# EAGLE board Tugas Akhir1 (EAGLE 7.5.0)
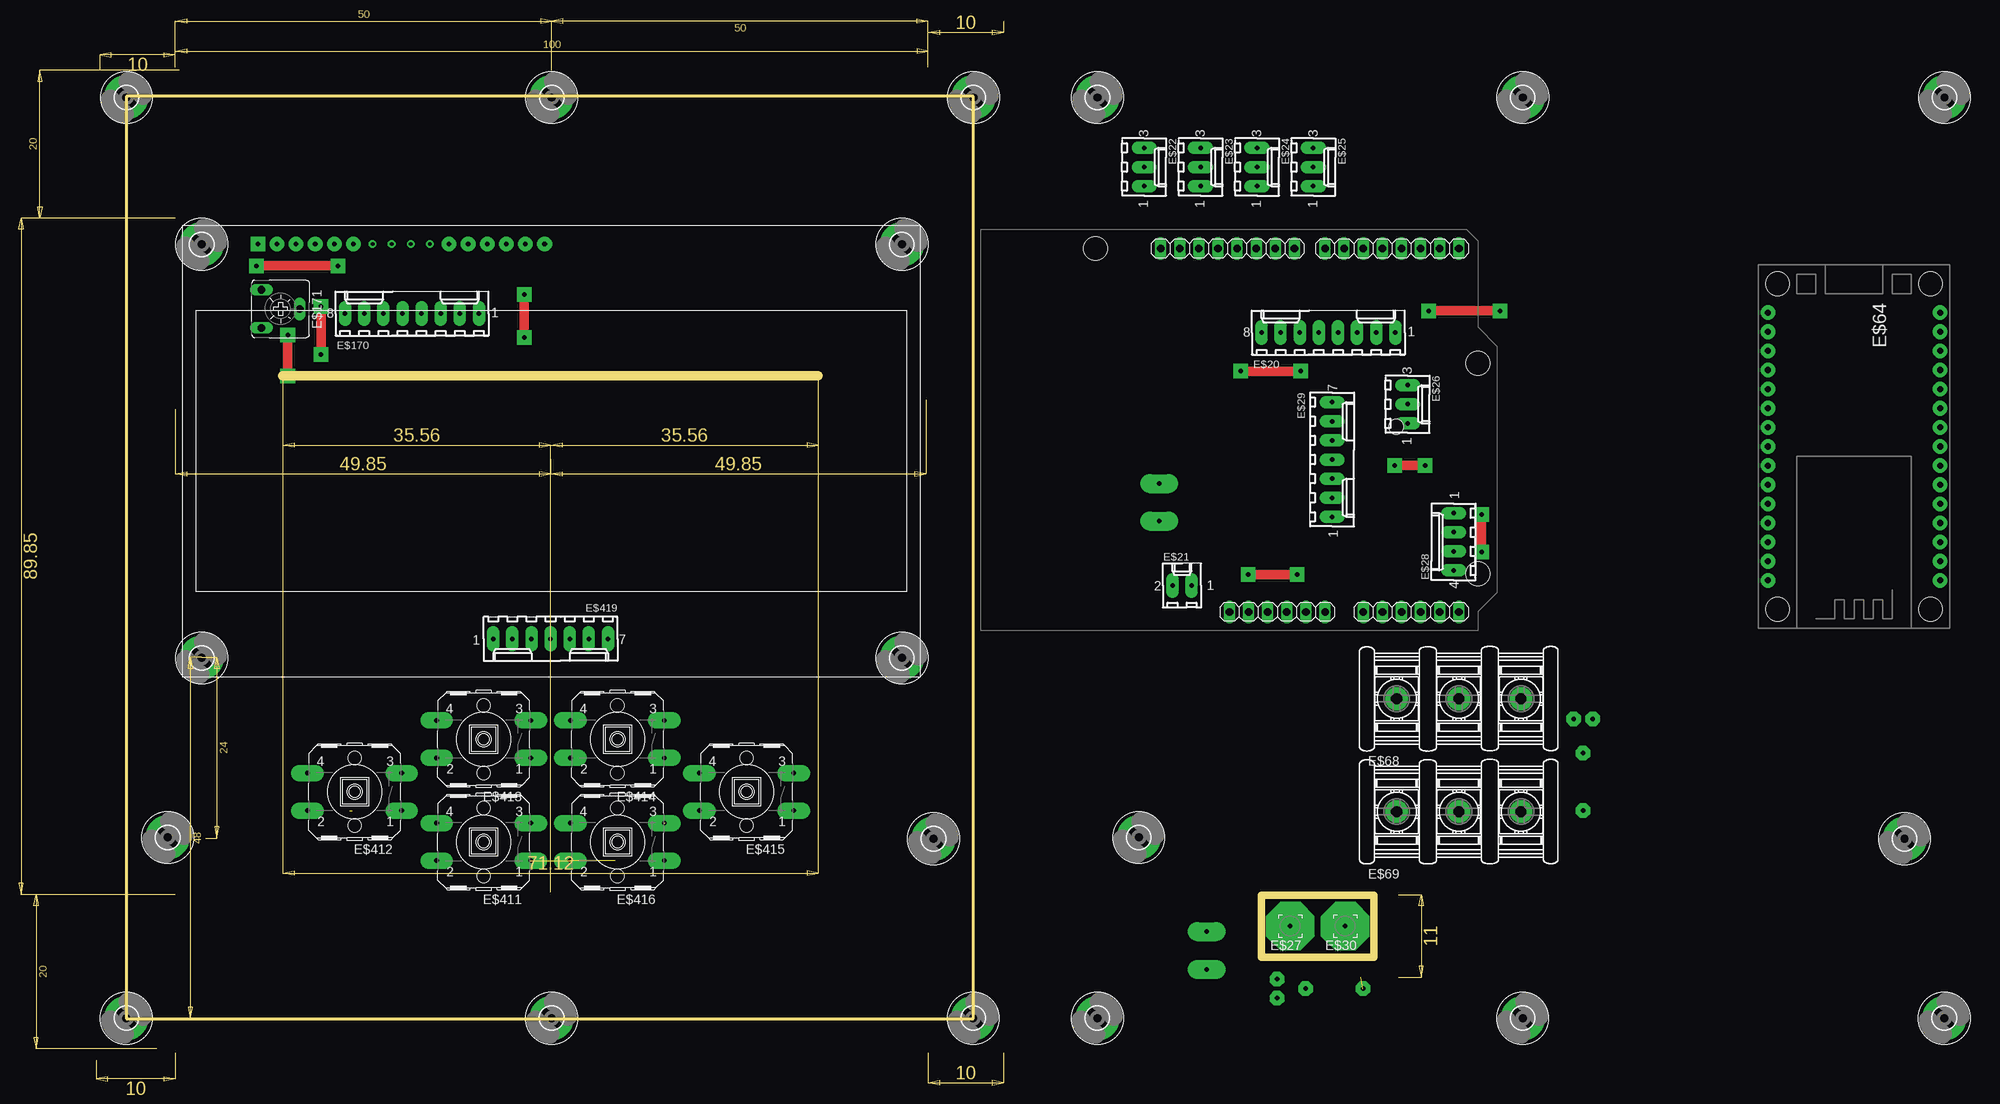
[diagram p0: board, top side]
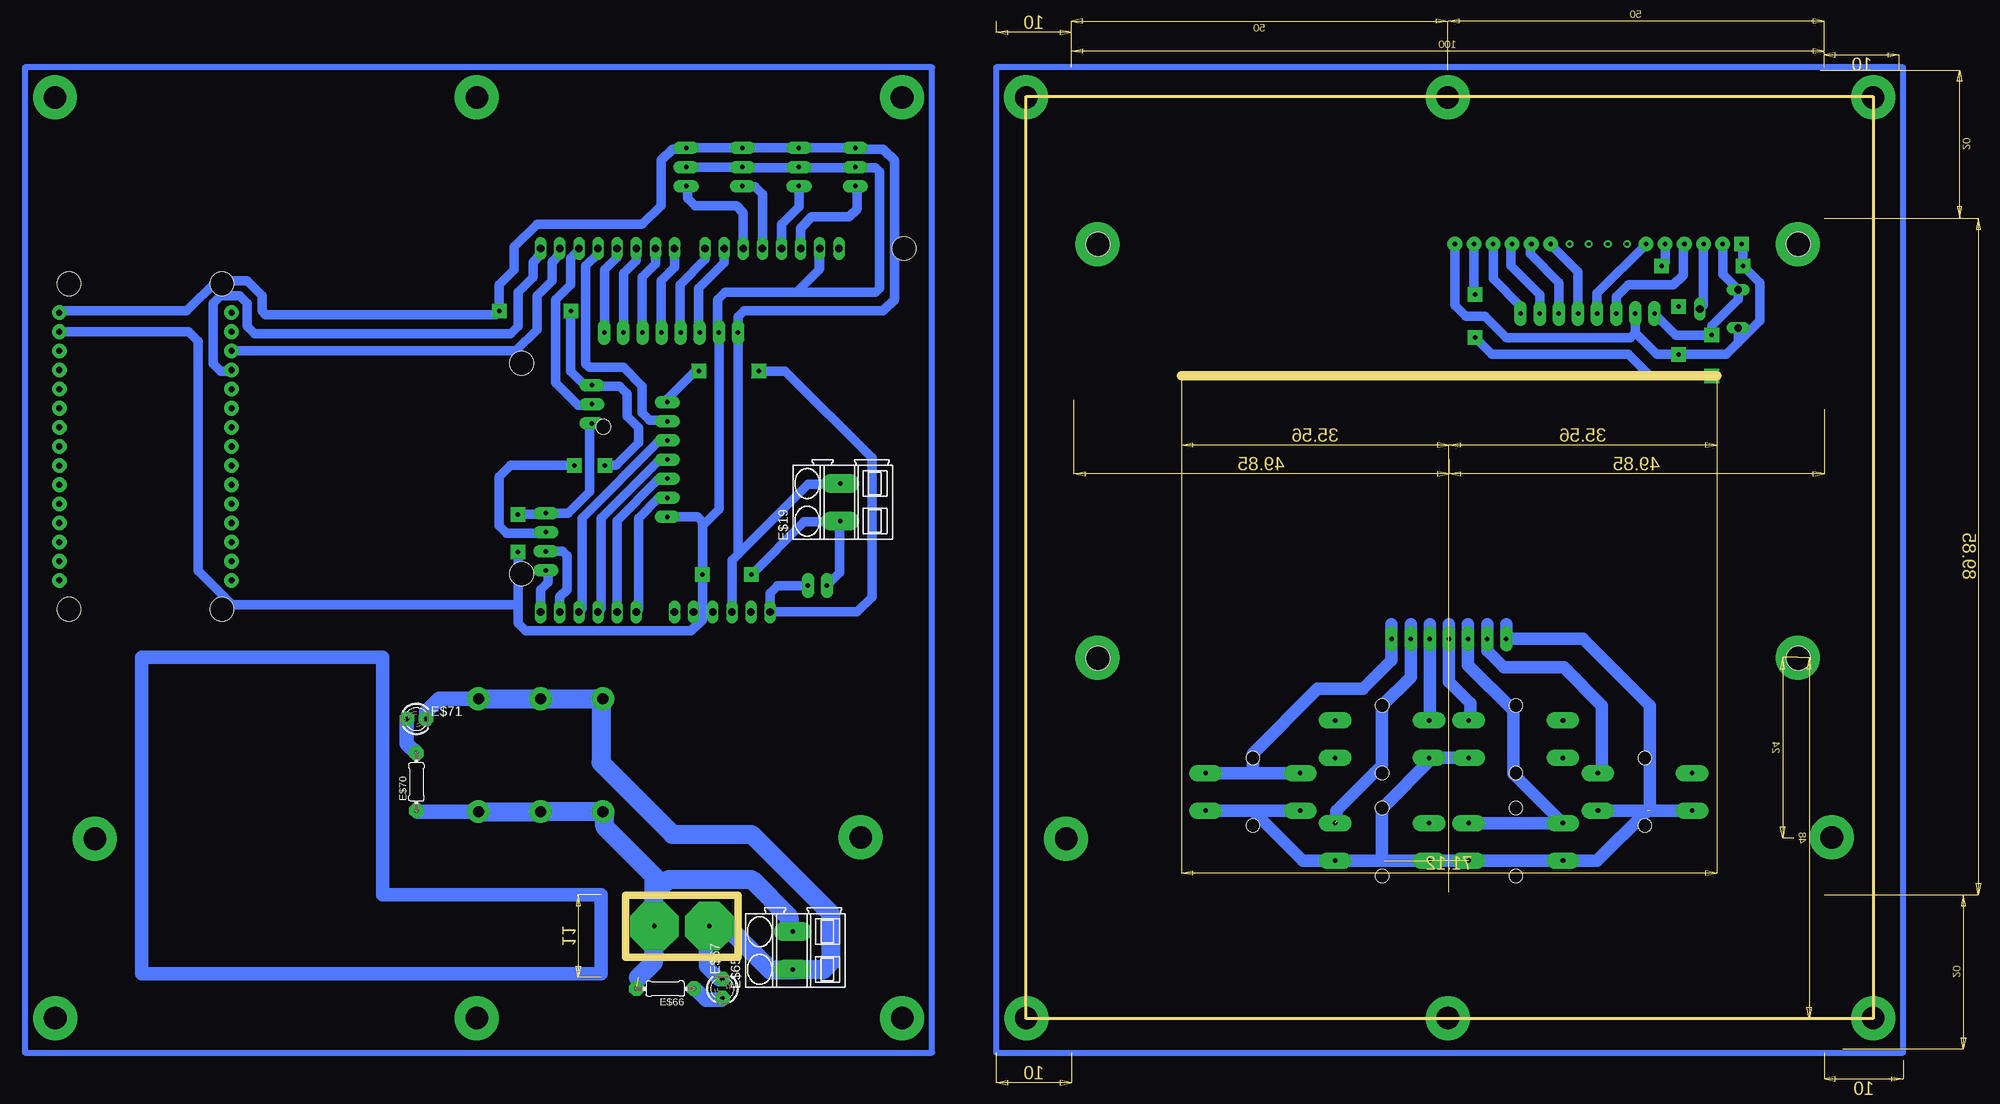
[diagram p1: board, bottom side, seen from below]

Size 186.6 x 141.6 mm. Coordinates in mm from the lower left corner, seen from the top.
Outline: 35.08,94.19 106.2,94.19
Outline: 126.8,131.3 14.3,131.3 14.3,8.8 126.8,8.8 126.8,131.3
Outline: 180.02,25.23 180.02,16.97 165.09,16.97 165.09,25.23 180.02,25.23
Copper layers (1*16): Top 0.035mm / dielectric 1.5mm / Bottom 0.035mm
Design rules "default": minimum track width 10mil, minimum drill 24mil, track to track 8mil, track to pad 8mil, pad to pad 8mil, via to via 8mil, smd to smd 8mil, copper to edge 40mil, drill to drill 8mil, minimum pad ring 10mil, minimum via ring 8mil, stop-mask expansion 4mil, vias tented up to drill 0mil, thermal gap 10mil

## Footprints (pad centres in the part's own frame; a part is rotated, then mirrored left to right if it is on the bottom)
3,0-PAD = drill 3 pad 5.842: B3,0 0,0
ARDUINO2009 = drill 1.016 long: 1 33.02,2.54; 2 35.56,2.54; 3 38.1,2.54; 4 40.64,2.54; 5 43.18,2.54; 6 45.72,2.54; 7 50.8,2.54; 8 53.34,2.54; 9 55.88,2.54; 10 58.42,2.54; 11 60.96,2.54; 12 63.5,2.54; 13 63.5,50.8; 14 60.96,50.8; 15 58.42,50.8; 16 55.88,50.8; 17 53.34,50.8; 18 50.8,50.8; 19 48.26,50.8; 20 45.72,50.8; 21 41.656,50.8; 22 39.116,50.8; 23 36.576,50.8; 24 34.036,50.8; 25 31.496,50.8; 26 28.956,50.8; 27 26.416,50.8; 28 23.876,50.8 | hole 3.2: 15.24,50.8; 66.04,35.56; 66.04,7.62 | hole 2: 55.17,27.114
SMKDSP_1,5/2 = drill 0.6 pad 2.54 long: 1 -2.5,0; 2 2.5,0
6410-08 = drill 0.6 pad 1.676 long: 1 8.89,0; 2 6.35,0; 3 3.81,0; 4 1.27,0; 5 -1.27,0; 6 -3.81,0; 7 -6.35,0; 8 -8.89,0
6410-02 = drill 0.6 pad 1.676 long: 1 1.27,0; 2 -1.27,0
6410-03 = drill 0.6 pad 1.676 long: 1 2.54,0; 2 0,0; 3 -2.54,0
3,17/1,3 = drill 0.6 pad 6.452 octagon: 1 0,0
6410-04 = drill 0.6 pad 1.676 long: 1 3.81,0; 2 1.27,0; 3 -1.27,0; 4 -3.81,0
6410-07 = drill 0.6 pad 1.676 long: 1 7.62,0; 2 5.08,0; 3 2.54,0; 4 0,0; 5 -2.54,0; 6 -5.08,0; 7 -7.62,0
ESP12E_DEVKIT = drill 0.8 pad 1.93: 3V3@0 -11.43,-7.62; 3V3@1 11.43,5.08; 3V3@2 11.43,-17.78; AD0 -11.43,17.78; CLK -11.43,-2.54; CMD -11.43,2.54; D0 11.43,17.78; D1 11.43,15.24; D2 11.43,12.7; D3 11.43,10.16; D4 11.43,7.62; D5 11.43,0; D6 11.43,-2.54; D7 11.43,-5.08; D8 11.43,-7.62; EN -11.43,-10.16; GND@0 -11.43,-5.08; GND@1 -11.43,-15.24; GND@2 11.43,2.54; GND@3 11.43,-15.24; RST -11.43,-12.7; RSV@0 -11.43,15.24; RSV@1 -11.43,12.7; RX 11.43,-10.16; SD0 -11.43,0; SD1 -11.43,5.08; SD2 -11.43,7.62; SD3 -11.43,10.16; TX 11.43,-12.7; VIN -11.43,-17.78 | hole 3.2: -10.16,21.59; 10.16,21.59; 10.16,-21.59; -10.16,-21.59
0204/7 = drill 0.6 pad 1.93 octagon: 1 -3.81,0; 2 3.81,0
LED3MM = drill 0.6 pad 1.93 octagon: A -1.27,0; K 1.27,0
5202-03-N-02 = drill 1.5 pad 3: 1 -8.25,0; 2 0,0; 3 8.25,0
LCD-20X4-4HOLES = drill 0.6 pad 1.93 square: P$1 10,57.5 | drill 0.6 pad 1.93: P$2 12.54,57.5; P$3 15.08,57.5; P$4 17.62,57.5; P$5 20.16,57.5; P$6 22.7,57.5; P$11 35.4,57.5; P$12 37.94,57.5; P$13 40.48,57.5; P$14 43.02,57.5; P$15 45.56,57.5; P$16 48.1,57.5 | drill 0.5 pad 0.254: P$7 25.24,57.5; P$8 27.78,57.5; P$9 30.32,57.5; P$10 32.86,57.5 | hole 3.2: 2.5,2.5; 2.5,57.5; 95.5,57.5; 95.5,2.5
CA6V = drill 1.016 long: A -2.54,-2.54; E 2.54,-2.54; S 0,2.54
B3F-40XX = drill 0.6 pad 2.184 long: 1 -6.248,2.489; 2 6.248,2.489; 3 -6.248,-2.489; 4 6.248,-2.489 | hole 1.803: 0,-4.496; 0,4.496

## Placement (x,y rotation side)
E$1  [3,0-PAD]  14.28,8.88 0 top
E$2  [3,0-PAD]  126.78,8.88 0 top
E$3  [3,0-PAD]  14.29,131.15 0 top
E$4  [3,0-PAD]  126.81,131.15 0 top
E$5  [3,0-PAD]  70.79,131.15 0 top
E$6  [3,0-PAD]  70.78,8.88 0 top
E$7  [3,0-PAD]  148.78,32.88 0 top
E$8  [3,0-PAD]  250.5,32.7 0 top  (outside the outline)
E$9  [ARDUINO2009]  127.8,60.3 0 top
E$13  [3,0-PAD]  143.28,8.88 0 top
E$14  [3,0-PAD]  255.78,8.88 0 top  (outside the outline)
E$15  [3,0-PAD]  143.29,131.15 0 top
E$16  [3,0-PAD]  255.81,131.15 0 top  (outside the outline)
E$17  [3,0-PAD]  199.79,131.15 0 top  (outside the outline)
E$18  [3,0-PAD]  199.78,8.88 0 top  (outside the outline)
E$19  [SMKDSP_1,5/2]  151.48,77.38 90 bottom
E$20  [6410-08]  173.97,99.92 0 top
E$21  [6410-02]  154.52,66.36 0 top
E$22  [6410-03]  149.48,121.91 270 top
E$23  [6410-03]  156.98,121.91 270 top
E$24  [6410-03]  164.48,121.91 270 top
E$25  [6410-03]  171.98,121.91 270 top
E$26  [6410-03]  184.48,90.41 270 top
E$27  [3,17/1,3]  168.91,21.1 180 top
E$28  [6410-04]  190.6,72.14 90 top  (outside the outline)
E$29  [6410-07]  174.45,83.07 270 top
E$30  [3,17/1,3]  176.21,21.1 180 top
E$64  [ESP12E_DEVKIT]  243.8,84.8 180 top  (outside the outline)
E$65  [SMKDSP_1,5/2]  157.79,17.86 90 bottom
E$66  [0204/7]  174.75,12.8 180 bottom
E$67  [LED3MM]  167.13,12.8 90 bottom
E$68  [5202-03-N-02]  191.3,51.3 0 top
E$69  [5202-03-N-02]  191.3,36.3 0 top
E$70  [0204/7]  207.8,40.25 90 bottom  (outside the outline)
E$71  [LED3MM]  207.8,48.63 0 bottom  (outside the outline)
E$169  [LCD-20X4-4HOLES]  21.75,54.18 0 top
E$170  [6410-08]  52.23,102.44 0 top
E$171  [CA6V]  34.77,103.08 270 top
E$411  [B3F-40XX]  61.75,32.28 180 top
E$412  [B3F-40XX]  44.61,38.95 180 top
E$413  [B3F-40XX]  61.75,45.93 180 top
E$414  [B3F-40XX]  79.53,45.93 180 top
E$415  [B3F-40XX]  96.68,38.95 180 top
E$416  [B3F-40XX]  79.53,32.28 180 top
E$417  [3,0-PAD]  19.78,32.88 0 top
E$418  [3,0-PAD]  121.5,32.7 0 top
E$419  [6410-07]  70.64,59.27 180 top
E$420  [3,0-PAD]  24.29,56.72 0 top
E$421  [3,0-PAD]  117.31,56.72 0 top
E$422  [3,0-PAD]  24.29,111.65 0 top
E$423  [3,0-PAD]  117.31,111.65 0 top

## Library data of the parts
E$1-E$8 E$13-E$18 E$417 E$418 E$420-E$423 = holes
E$9 = arduino
E$19 E$65 = con-phoenix-smkdsp
E$20-E$26 E$28 E$29 E$170 E$419 = con-molex
E$27 E$30 = wirepad
E$64 = ESP12E_DEVKIT
E$66 E$70 = resistor
E$67 E$71 = led
E$68 E$69 = con-ebyelectro
E$169 = HD44780LCD
E$171 = pot
E$411-E$416 = switch-omron

## Nets
S$75: E$9.16 E$29.6
S$76: E$9.4 E$9.5 E$9.27 E$19.1 E$20.7 E$21.2 E$22.2 E$23.2 E$24.2 E$25.2 E$26.1 E$28.1 E$29.1 E$64.GND@1
S$77: E$9.1 E$21.1 E$29.7
S$79: E$9.13 E$64.RX
S$80: E$9.26 E$22.1
S$81: E$9.25 E$23.1
S$82: E$9.24 E$24.1
S$83: E$9.23 E$25.1
S$90: E$9.14 E$64.TX
S$95: E$9.17 E$20.1
S$96: E$9.18 E$20.2
S$97: E$9.19 E$20.3
S$98: E$9.20 E$20.4
S$99: E$9.12 E$28.4
S$100: E$9.11 E$28.3
S$101: E$9.7 E$29.2
S$102: E$9.8 E$29.3
S$103: E$9.9 E$29.4
S$104: E$9.10 E$29.5
S$105: E$9.21 E$20.5
S$106: E$9.22 E$20.6
S$107: E$9.15 E$26.2
S$110: E$9.3 E$19.2 E$20.8 E$22.3 E$23.3 E$24.3 E$25.3 E$26.3 E$28.2 E$64.VIN
S$119: E$27.1 E$65.1 E$67.K E$68.1 E$68.2 E$68.3 E$71.K
S$120: E$30.1 E$65.2 E$66.2 E$69.1 E$69.2 E$69.3 E$70.1
S$121: E$70.2 E$71.A
S$122: E$66.1 E$67.A
S$213: E$169.P$2 E$169.P$15 E$170.8 E$171.A
S$214: E$169.P$1 E$169.P$5 E$169.P$16 E$170.7 E$171.E
S$215: E$169.P$4 E$170.6
S$216: E$169.P$6 E$170.5
S$217: E$169.P$14 E$170.1
S$218: E$169.P$13 E$170.2
S$219: E$169.P$12 E$170.3
S$220: E$169.P$11 E$170.4
S$221: E$169.P$3 E$171.S
S$401: E$411.3 E$411.4 E$419.3
S$402: E$411.1 E$411.2 E$412.1 E$412.2 E$413.1 E$414.2 E$415.1 E$415.2 E$416.1 E$416.2 E$419.1
S$403: E$412.3 E$419.2
S$404: E$413.3 E$419.4
S$405: E$414.4 E$419.5
S$406: E$416.3 E$419.6
S$407: E$415.3 E$415.4 E$419.7

## Tracks (layer width: path | path; a pad name or v marks a point on that pad's centre or on a via)
S$1
  Bottom 0.813: 139.3,135.15 259.81,135.15 259.81,4.29 139.3,4.29 139.3,135.15
S$2  (via drill 0.6 pad 1.93)
  other vias: 163.3,67.8
S$56  (via drill 0.6 pad 1.93)
  other vias: 169.8,67.8
S$75
  Bottom 1.27: E$9.16 183.68,110.42 185.3,108.8 185.3,95.8 184.8,95.3 180.3,95.3 177.8,92.8 177.8,89.3 176.8,88.3 174.6,88.3 E$29.6
S$76  (via drill 0.6 pad 1.93)
  Top 1.27: v169.8,67.8 v163.3,67.8 | v194.3,75.8 v194.3,70.8
  Bottom 0.406: 184.8,85.7 184.8,85.8
  Bottom 1.27: E$9.5 E$9.4 169.76,62.84 169.8,62.8 | 169.8,62.8 v169.8,67.8 169.8,74.3 | v163.3,67.8 156.3,74.8 151.56,74.8 | 151.56,74.8 E$19.1 | E$29.1 170.45,75.45 169.8,74.8 169.8,74.3 | 154.3,108.3 154.22,108.38 E$9.27 154.22,110.88 154.3,110.8 154.3,108.3 | 157.3,105.3 166.8,105.3 167.8,104.3 167.8,100.11 E$20.7 167.62,76.48 169.8,74.3 | 154.3,108.3 157.3,105.3 | 157.3,105.3 146.8,105.3 146.3,105.8 146.3,121.3 146.8,121.8 149.3,121.8 | 149.3,121.8 149.36,121.8 | 149.36,121.8 E$22.2 149.41,121.91 149.3,121.8 | 149.36,121.8 156.86,121.8 E$23.2 157.19,121.91 157.3,121.8 164.36,121.8 E$24.2 E$25.2 | 151.56,74.8 151.56,68.05 E$21.2 | 184.8,85.7 184.8,78.8 187.64,75.95 E$28.1 190.45,75.95 190.3,75.8 v194.3,75.8 | v194.3,70.8 194.3,63.8 | 194.3,63.8 194.3,61.3 193.3,60.3 171.3,60.3 169.8,61.8 169.8,62.8 | E$64.GND@1 238.04,100.04 236.8,98.8 236.8,68.3 232.3,63.8 194.3,63.8 | 184.8,85.8 184.8,87.55 E$26.1
S$77  (via drill 0.6 pad 1.93)
  Top 1.27: v162.3,94.8 v170.3,94.8
  Bottom 1.27: E$21.1 155.86,66.3 159.8,66.3 160.82,65.28 E$9.1 149.26,62.84 147.3,64.8 147.3,83.3 158.8,94.8 v162.3,94.8 | v170.3,94.8 170.8,94.8 174.45,91.15 E$29.7
S$78  (via drill 0.6 pad 1.93)
  other vias: 187.3,102.8
S$79
  Bottom 1.27: E$9.13 191.3,110.3 192.3,109.3 192.3,107.3 194.3,105.3 194.3,100.8 195.3,99.8 229.3,99.8 230.3,100.8 230.3,103.8 231.3,104.8 233.8,104.8 234.8,103.8 234.8,95.8 233.8,94.8 232.53,94.8 E$64.RX
S$80
  Bottom 1.27: E$9.26 156.76,110.84 156.8,110.8 156.8,113.8 155.3,115.3 150.3,115.3 149.3,116.3 149.3,119.2 E$22.1
S$81
  Bottom 1.27: E$23.1 156.98,116.62 159.3,114.3 E$9.25
S$82
  Bottom 1.27: E$24.1 164.38,119.38 164.3,119.3 162.8,119.3 161.8,118.3 161.8,111.14 E$9.24
S$83
  Bottom 1.27: E$9.23 164.38,115.88 165.3,116.8 170.8,116.8 171.8,117.8 171.8,119.2 E$25.1
S$90
  Bottom 1.27: E$9.14 188.76,110.34 189.8,109.3 189.8,106.8 191.8,104.8 191.8,100.3 194.6,97.5 E$64.TX
S$93  (via drill 0.6 pad 1.93)
  other vias: 170.3,94.8
S$94  (via drill 0.6 pad 1.93)
  other vias: 162.3,94.8
S$95
  Bottom 1.27: E$9.17 181.14,109.96 182.8,108.3 182.8,99.98 E$20.1
S$96
  Bottom 1.27: E$9.18 178.6,109.5 180.3,107.8 180.3,99.94 E$20.2
S$97
  Bottom 1.27: E$9.19 176.06,109.04 177.8,107.3 177.8,99.95 E$20.3
S$98
  Bottom 1.27: E$9.20 173.52,108.58 175.3,106.8 175.3,99.99 E$20.4
S$99
  Bottom 1.27: 191.3,62.8 E$9.12 191.3,65.8 190.3,66.8 190.3,68.03 E$28.4
S$100
  Bottom 1.27: E$9.11 188.76,64.84 187.8,65.8 187.8,70.3 188.38,70.88 E$28.3
S$101
  Bottom 1.27: E$29.2 175.61,77.99 178.3,75.3 178.3,63.14 E$9.7
S$102
  Bottom 1.27: E$29.3 174.18,80.3 175.8,80.3 181.14,74.96 E$9.8
S$103
  Bottom 1.27: E$29.4 175.53,83.07 183.3,75.3 183.3,63.22 E$9.9
S$104
  Bottom 1.27: E$29.5 175.49,85.61 185.8,75.3 185.8,63.26 E$9.10
S$105
  Bottom 1.27: E$9.21 169.46,109.64 172.8,106.3 172.8,100.03 E$20.5
S$106
  Bottom 1.27: E$9.22 166.92,109.18 170.3,105.8 170.3,100.07 E$20.6
S$107
  Bottom 1.27: E$9.15 186.3,111.02 186.3,110.8 187.3,109.8 187.3,106.3 189.3,104.3 189.3,93.3 186.3,90.3 184.59,90.3 E$26.2
S$108  (via drill 0.6 pad 1.93)
  other vias: 196.8,102.8
S$109  (via drill 0.6 pad 1.93)
  other vias: 194.3,75.8
S$110  (via drill 0.6 pad 1.93)
  Top 1.27: v187.3,102.8 v196.8,102.8 | v186.8,82.3 v182.8,82.3
  Bottom 1.27: E$9.3 165.9,69.7 165.08,70.52 | 165.08,70.52 155.8,79.8 151.56,79.8 E$19.2 | 165.08,70.52 E$20.8 165.08,102.02 164.3,102.8 145.8,102.8 144.3,104.3 144.3,122.8 145.8,124.3 149.32,124.3 E$22.3 E$23.3 E$24.3 E$25.3 172.13,124.3 173.8,124.3 175.3,122.8 175.3,116.8 177.8,114.3 191.8,114.3 194.8,111.3 194.8,108.3 196.8,106.3 v196.8,102.8 197.3,102.3 227.8,102.3 228.3,102.8 228.3,104.8 230.3,106.8 234.3,106.8 238.3,102.8 255.3,102.8 255.23,102.73 E$64.VIN | E$28.2 190.69,73.41 190.8,73.3 195.8,73.3 196.8,74.3 196.8,80.8 195.3,82.3 v186.8,82.3 | v182.8,82.3 181.3,82.3 178.3,85.3 178.3,87.3 179.8,88.8 179.8,91.8 180.8,92.8 184.32,92.8 E$26.3 185.45,92.95 187.3,94.8 v187.3,102.8
S$111  (via drill 0.6 pad 1.93)
  other vias: 194.3,70.8
S$112  (via drill 0.6 pad 1.93)
  other vias: 186.8,82.3
S$113  (via drill 0.6 pad 1.93)
  other vias: 182.8,82.3
S$119
  Bottom 1.93: E$67.K 167.57,14.07 169.3,15.8 169.3,20.71 E$27.1 | E$71.K 206.53,49.57 204.8,51.3 E$68.3
  Bottom 2.54: E$27.1 166.6,21.1 160.8,15.3 157.86,15.3 E$65.1 157.79,15.3 153.8,15.3 152.8,16.3 152.8,22.8 163.3,33.3 173.8,33.3 183.3,42.8 183.3,51.3 | E$68.3 E$68.2 183.3,51.3 | E$68.1 183.3,51.3
S$120  (1 unrouted)
  Bottom 1.93: E$69.3 207.66,36.3 E$70.1
  Bottom 2.54: E$30.1 176.21,20.89 176.3,20.8 176.3,16.3 178.3,14.3 | E$30.1 176.21,27.71 182.8,34.3 182.8,36.05 E$69.1 E$69.2 E$69.3 | E$30.1 176.21,25.39 174.3,27.3 163.3,27.3 158.3,22.3 158.3,20.87 E$65.2
S$121
  Bottom 1.93: E$71.A 209.07,45.33 E$70.2
S$122
  Bottom 1.93: E$66.1 170.8,12.8 169.3,11.3 167.36,11.3 E$67.A
S$123
  Bottom 1.778: 183.3,25.3 212.3,25.3 212.3,56.8 244.3,56.8 244.3,14.8 183.3,14.8 183.3,25.3
S$213  (via drill 0.6 pad 1.93)
  Top 1.27: v67.15,104.98 v67.15,99.27 | v35.72,94.19 v35.72,99.59
  Bottom 1.27: E$170.8 40.48,99.59 v35.72,99.59 35.72,100.86 32.22,104.35 E$171.A 34.29,107.68 E$169.P$2 | E$169.P$15 67.31,105.46 v67.15,104.98 | v67.15,99.27 64.93,97.05 46.83,97.05 43.97,94.19 v35.72,94.19
S$214  (via drill 0.6 pad 1.93)
  Top 1.27: v42.38,108.8 v31.59,108.8 | v40.16,103.4 v40.16,97.05
  Bottom 1.27: E$169.P$5 41.91,109.27 v42.38,108.8 | E$169.P$1 31.59,111.53 v31.59,108.8 29.37,106.57 29.37,101.49 32.22,98.63 | E$170.7 45.88,99.91 | 45.88,99.91 43.02,97.05 v40.16,97.05 33.81,97.05 32.22,98.63 | E$169.P$16 69.85,103.55 68.42,102.13 65.88,102.13 63.02,99.27 46.51,99.27 45.88,99.91 | E$171.E 32.22,98.63
S$215
  Bottom 1.27: E$170.6 48.42,104.67 46.83,106.25 40.8,106.25 39.53,107.52 39.53,111.52 E$169.P$4
S$216
  Bottom 1.27: E$170.5 50.96,105.17 E$169.P$6
S$217
  Bottom 1.27: E$169.P$14 64.77,107.05 61.12,103.4 E$170.1
S$218
  Bottom 1.27: E$170.2 58.58,104.98 62.39,108.8 62.39,111.52 E$169.P$13
S$219
  Bottom 1.27: E$170.3 56.04,106.57 59.85,110.38 59.85,111.52 E$169.P$12
S$220
  Bottom 1.27: E$170.4 53.5,108.03 E$169.P$11
S$221
  Bottom 1.27: E$169.P$3 36.83,103.56 E$171.S
S$222
  Bottom 0.813: 10.29,135.15 130.81,135.15 130.81,4.29 10.29,4.29 10.29,135.15
S$401
  Bottom 1.676: E$411.3 E$411.4 62.07,41.33 62.07,49.74 68.1,55.77 E$419.3 68.1,61.17
S$402  (3 unrouted)
  Bottom 1.676: 79.22,29.79 E$411.2 50.96,29.79 44.29,36.46 | 79.22,29.79 E$416.1 90.01,29.79 96.68,36.46 | E$414.2 E$413.1 72.81,43.44 79.53,36.72 79.53,30.11 79.22,29.79 | E$419.1 52.86,59.27 43.97,50.38 43.97,36.4 | E$412.2 44.29,36.46 | 44.29,36.46 E$412.1 | E$415.2 96.68,36.46 | 96.68,36.46 E$415.1
S$403
  Bottom 1.676: 65.56,61.17 E$419.2 65.56,57.68 63.34,55.45 55.4,55.45 50.32,50.38 50.32,41.97 E$412.3
S$404
  Bottom 1.676: E$413.3 67.78,48.63 67.78,50.69 70.64,53.55 E$419.4 70.64,61.17
S$405
  Bottom 1.676: E$414.4 73.18,48.52 E$419.5 73.18,61.17
S$406  (1 unrouted)
  Bottom 1.676: 85.56,34.98 85.56,36.4 79.53,42.44 79.53,50.38 75.72,54.18 E$419.6 75.72,61.17
S$407
  Bottom 1.676: 78.26,61.17 E$419.7 78.26,56.41 82.07,52.6 88.1,52.6 96.68,44.02 96.68,41.43 | E$415.3 96.68,41.43 | 96.68,41.43 E$415.4
S$408
  Bottom 1.676: 63.02,59.58 63.02,61.17

## Text on the board
Pads: IOT TELEGRAM | PROJECT